# EAGLE board E-Piano-SM (EAGLE 9.4.0)
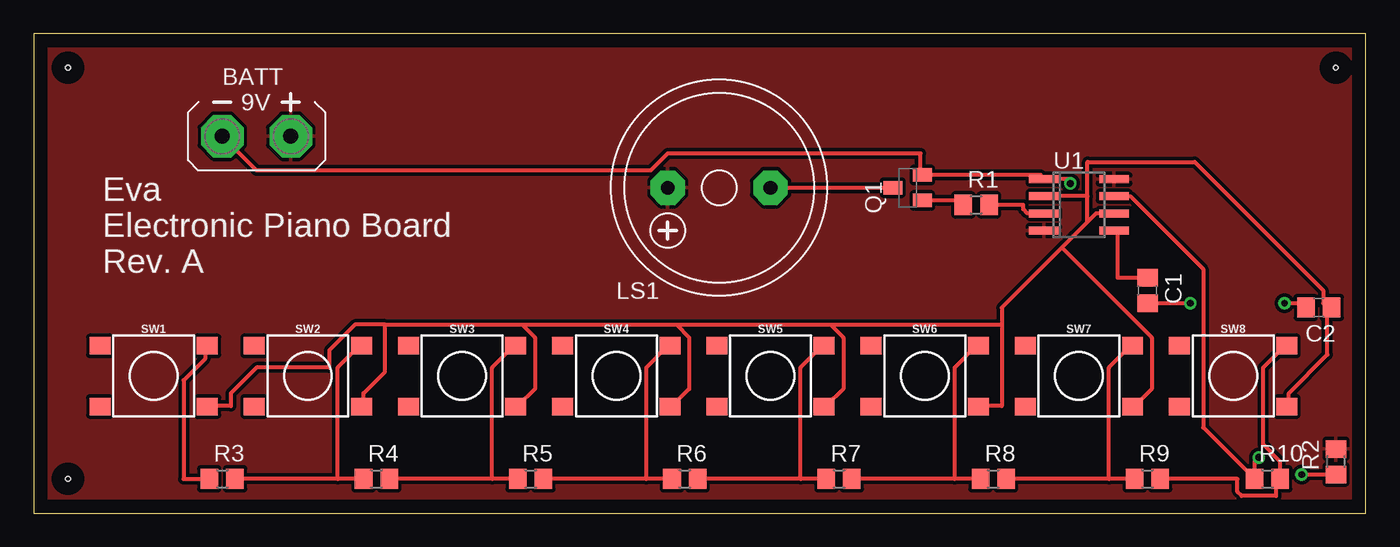
[diagram p0: board, top side]
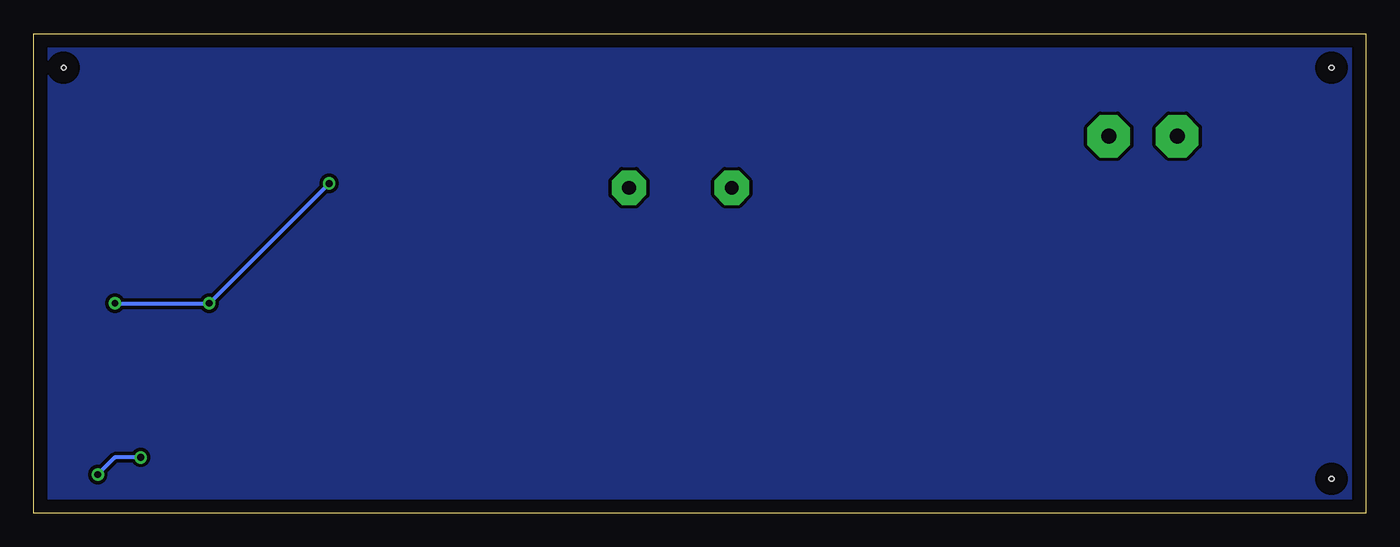
[diagram p1: board, bottom side, seen from below]

Size 98.73 x 35.55 mm. Coordinates in mm from the lower left corner, seen from the top.
Outline: 0,0 98.73,0 98.73,35.55 0,35.55 0,0
Copper layers (1*16): Top 0.035mm / dielectric 1.5mm / Bottom 0.035mm
Design rules "default": minimum track width 6mil, minimum drill 0.35mm, track to track 6mil, track to pad 6mil, pad to pad 6mil, via to via 6mil, smd to smd 6mil, copper to edge 40mil, drill to drill 6mil, minimum pad ring 10mil, minimum via ring 8mil, stop-mask expansion 4mil, vias tented up to drill 0mil, thermal gap 10mil
Net classes: 0 default: width 0.305 mm, drill 0.508 mm, clearance 0.254 mm
Holes 0.35 mm at 2.54,33.02 96.52,33.02 2.54,2.54

## Footprints (pad centres in the part's own frame; a part is rotated, then mirrored left to right if it is on the bottom)
AB9V = drill 1.118 pad 3.15 octagon: + 0,2.54; - 0,-2.54
C0805 = smd 1.3 x 1.5: 1 -0.95,0; 2 0.95,0
F/HMB = drill 1.016 pad 2.54 octagon: + 3.81,0; - -3.81,0
SOT23-BEC = smd 1 x 1.4: B -0.95,-1.1; C 0,1.1; E 0.95,-1.1
R0805 = smd 1.3 x 1.5: 1 -0.95,0; 2 0.95,0
TACTILE_SWITCH_SMD_6.2MM_TALL = smd 1.55 x 1.3: A1 -3.975,-2.25; A2 3.975,-2.25; B1 -3.975,2.25; B2 3.975,2.25
SO08 = smd 0.6 x 2.2: 1 -1.905,-2.6; 2 -0.635,-2.6; 3 0.635,-2.6; 4 1.905,-2.6; 5 1.905,2.6; 6 0.635,2.6; 7 -0.635,2.6; 8 -1.905,2.6

## Placement (x,y rotation side)
BATT  AB9V  [AB9V]  16.51,27.94 270 top
C1  0.1uF  [C0805]  82.55,16.51 270 top
C2  0.1uF  [C0805]  95.25,15.24 180 top
LS1  [F/HMB]  50.8,24.13 180 top
Q1  BCW66  [SOT23-BEC]  64.77,24.13 90 top
R1  1K  [R0805]  69.85,22.86 0 top
R2  1K  [R0805]  96.52,3.81 90 top
R3  1.5K  [R0805]  13.97,2.54 0 top
R4  1.3K  [R0805]  25.4,2.54 0 top
R5  620  [R0805]  36.83,2.54 0 top
R6  1.1K  [R0805]  48.26,2.54 0 top
R7  1K  [R0805]  59.69,2.54 0 top
R8  910  [R0805]  71.12,2.54 0 top
R9  390  [R0805]  82.55,2.54 0 top
R10  6.2K  [R0805]  91.44,2.54 0 top
SW1  MOMENTARY-SWITCH-SPST-SMD-6.2MM-TALL  [TACTILE_SWITCH_SMD_6.2MM_TALL]  8.89,10.16 0 top
SW2  MOMENTARY-SWITCH-SPST-SMD-6.2MM-TALL  [TACTILE_SWITCH_SMD_6.2MM_TALL]  20.32,10.16 0 top
SW3  MOMENTARY-SWITCH-SPST-SMD-6.2MM-TALL  [TACTILE_SWITCH_SMD_6.2MM_TALL]  31.75,10.16 0 top
SW4  MOMENTARY-SWITCH-SPST-SMD-6.2MM-TALL  [TACTILE_SWITCH_SMD_6.2MM_TALL]  43.18,10.16 0 top
SW5  MOMENTARY-SWITCH-SPST-SMD-6.2MM-TALL  [TACTILE_SWITCH_SMD_6.2MM_TALL]  54.61,10.16 0 top
SW6  MOMENTARY-SWITCH-SPST-SMD-6.2MM-TALL  [TACTILE_SWITCH_SMD_6.2MM_TALL]  66.04,10.16 0 top
SW7  MOMENTARY-SWITCH-SPST-SMD-6.2MM-TALL  [TACTILE_SWITCH_SMD_6.2MM_TALL]  77.47,10.16 0 top
SW8  MOMENTARY-SWITCH-SPST-SMD-6.2MM-TALL  [TACTILE_SWITCH_SMD_6.2MM_TALL]  88.9,10.16 0 top
U1  NE555D  [SO08]  77.47,22.86 270 top

## Library data of the parts
BATT = battery
C1 C2 = rcl; MOUSER#: 791-MT21B104K500CT; MPN: MT21B104K500CT; OC_NEWARK: unknown; SPICEPREFIX: C
LS1 = buzzer; MOUSER#: 665-AST-01508MR-R; OC_FARNELL: unknown; OC_NEWARK: unknown
Q1 = transistor; MF: INFINION TECHNOLOGIES; MOUSER#: 726-BCW66KHE6327HTSA; MPN: BCW66KHE6327HTSA1; OC_NEWARK: 58K2048
R1 R2 R7 = rcl; MOUSER#: 652-CR0805FX-1001ELF; MPN: CR0805FX-1001ELF; OC_NEWARK: unknown; SPICEPREFIX: R
R3 = rcl; MOUSER#: 652-CR0805FX-1501ELF; MPN: CR0805FX-1501ELF; OC_NEWARK: unknown; SPICEPREFIX: R
R4 = rcl; MOUSER#: 652-CR0805JW-132ELF; MPN: CR0805JW-132ELF; OC_NEWARK: unknown; SPICEPREFIX: R
R5 = rcl; MOUSER#: 652-CR0805JW-621ELF; MPN: CR0805JW-621ELF; OC_NEWARK: unknown; SPICEPREFIX: R
R6 = rcl; MOUSER#: 652-CR0805FX-1101ELF; MPN: CR0805FX-1101ELF; OC_NEWARK: unknown; SPICEPREFIX: R
R8 = rcl; MOUSER#: 652-CR0805FX-9100ELF; MPN: CR0805FX-9100ELF; OC_NEWARK: unknown; SPICEPREFIX: R
R9 = rcl; MOUSER#: 652-CR0805JW-391ELF; MPN: CR0805JW-391ELF; OC_NEWARK: unknown; SPICEPREFIX: R
R10 = rcl; MOUSER#: 652-CR0805FX-6201ELF; MPN: CR0805FX-6201ELF; OC_NEWARK: unknown; SPICEPREFIX: R
SW1-SW8 = SparkFun-Switches; MOUSER#: 653-B3F-1000; OC_NEWARK: unknown; PROD_ID: SWCH-11966; SF_SKU: COM-12992
U1 = linear; MOUSER#: 595-TLC555CDR; MPN: TLC555CDR; OC_NEWARK: 24M8296

## Nets
0: BATT.- C1.2 C2.2 Q1.E U1.1
N$1: R9.2 R10.2 SW8.B2
N$2: R2.1 R10.1 U1.7
N$3: R3.1 SW1.B2
N$4: R8.2 R9.1 SW7.B2
N$5: R7.2 R8.1 SW6.B2
N$6: R6.2 R7.1 SW5.B2
N$7: R5.2 R6.1 SW4.B2
N$8: R4.2 R5.1 SW3.B2
N$9: R3.2 R4.1 SW2.B2
N$11: R1.2 U1.3
N$12: C1.1 U1.5
N$13: LS1.- Q1.C
N$14: Q1.B R1.1
TR: C2.1 SW1.A2 SW2.A2 SW3.A2 SW4.A2 SW5.A2 SW6.A2 SW7.A2 SW8.A2 U1.2 U1.6
VCC: BATT.+ LS1.+ R2.2 U1.4 U1.8

## Tracks (layer width: path | path; a pad name or v marks a point on that pad's centre or on a via)
0  (via drill 0.51)
  Top 0.305: v85.72,15.56 C1.2 | v92.71,15.56 94.3,15.56 C2.2 | v76.83,24.45 76.83,24.77 U1.1 74.61,24.77 74.61,25.08 66.04,25.08 Q1.E 65.72,25.08 65.72,26.67 46.99,26.67 45.72,25.4 16.51,25.4 BATT.-
  Bottom 0.305: v92.71,15.56 v85.72,15.56 v76.83,24.45
00
  pour Bottom: 0,35.56 0,0 99.06,0 99.06,35.56
N$1
  Top 0.305: R9.2 89.22,2.54 89.22,1.59 89.53,1.27 92.08,1.27 92.08,2.54 R10.2 92.39,3.81 91.12,5.08 91.12,10.79 92.71,12.38 SW8.B2
N$2  (via drill 0.51)
  Top 0.305: R10.1 86.68,6.35 86.68,18.1 81.28,23.5 U1.7 | v93.98,2.86 R2.1 | v90.81,4.13 90.49,3.81 R10.1 | R10.1
  Bottom 0.305: v93.98,2.86 92.71,4.13 v90.81,4.13
N$3
  Top 0.305: R3.1 11.11,2.54 11.11,9.84 12.7,11.43 12.7,12.38 SW1.B2
N$4
  Top 0.305: R9.1 79.69,2.54 | 79.69,2.54 R8.2 | 79.69,2.54 79.69,10.79 81.28,12.38 SW7.B2
N$5
  Top 0.305: R8.1 68.26,2.54 | 68.26,2.54 R7.2 | 68.26,2.54 68.26,10.79 69.85,12.38 SW6.B2
N$6
  Top 0.305: R7.1 56.83,2.54 | 56.83,2.54 R6.2 | 56.83,2.54 56.83,10.79 58.42,12.38 SW5.B2
N$7
  Top 0.305: R6.1 45.4,2.54 | 45.4,2.54 R5.2 | 45.4,2.54 45.4,10.79 46.99,12.38 SW4.B2
N$8
  Top 0.305: R5.1 33.97,2.54 | 33.97,2.54 R4.2 | 33.97,2.54 33.97,10.79 35.56,12.38 SW3.B2
N$9
  Top 0.305: R4.1 22.54,2.54 | 22.54,2.54 R3.2 | 22.54,2.54 22.54,10.79 24.13,12.38 SW2.B2
N$11
  Top 0.305: R1.2 73.34,22.86 73.34,22.54 73.66,22.23 U1.3
N$12
  Top 0.305: C1.1 80.33,17.46 80.33,20.95 U1.5
N$13
  Top 0.305: LS1.- Q1.C
N$14
  Top 0.305: Q1.B 66.04,23.18 68.9,23.18 R1.1
TR
  Top 0.305: 95.89,15.24 95.89,11.75 93.03,8.89 93.03,7.94 SW8.A2 | 71.75,13.97 71.75,15.24 76.2,19.68 | 71.75,13.97 71.75,7.94 70.17,7.94 SW6.A2 | 78.11,21.59 78.74,22.23 U1.6 | 78.11,21.59 76.2,19.68 | 76.2,19.68 82.87,13.02 82.87,9.21 81.6,7.94 SW7.A2 | 78.11,23.5 U1.2 | 78.11,21.59 78.11,23.5 | 95.89,15.24 95.57,15.56 95.57,16.51 86.04,26.04 78.11,26.04 78.11,23.5 | 95.89,15.24 C2.1 | 26.04,13.97 23.81,13.97 21.91,12.06 21.91,10.79 16.51,10.79 14.61,8.89 14.61,7.94 13.02,7.94 SW1.A2 | 26.04,13.97 26.04,10.48 24.45,8.89 24.45,7.94 SW2.A2 | 36.2,13.97 37.15,13.02 37.15,9.21 35.88,7.94 SW3.A2 | 26.04,13.97 36.2,13.97 | 47.62,13.97 48.58,13.02 48.58,9.21 47.31,7.94 SW4.A2 | 36.2,13.97 47.62,13.97 | 59.05,13.97 60.01,13.02 60.01,9.21 58.74,7.94 SW5.A2 | 47.62,13.97 59.05,13.97 | 59.05,13.97 71.75,13.97
VCC
  pour Top: -1.27,36.83 -1.27,-1.27 100.33,-1.27 100.33,36.83

## Text on the board
tPlace: Eva / Electronic Piano Board / Rev. A